# Altium PCB WEST_Radio_AX5043.PcbDoc (part 2 of 3)
Units mil, origin at the board's own origin, x right, y up, seen from the top; angles counter-clockwise.
Board outline 6000 x 4000 mil, 2 copper layers (Top Layer, Bottom Layer); 127 components, 96 nets, 412 pads, 18 vias.
Unrouted connection lines stored in the file: 276.
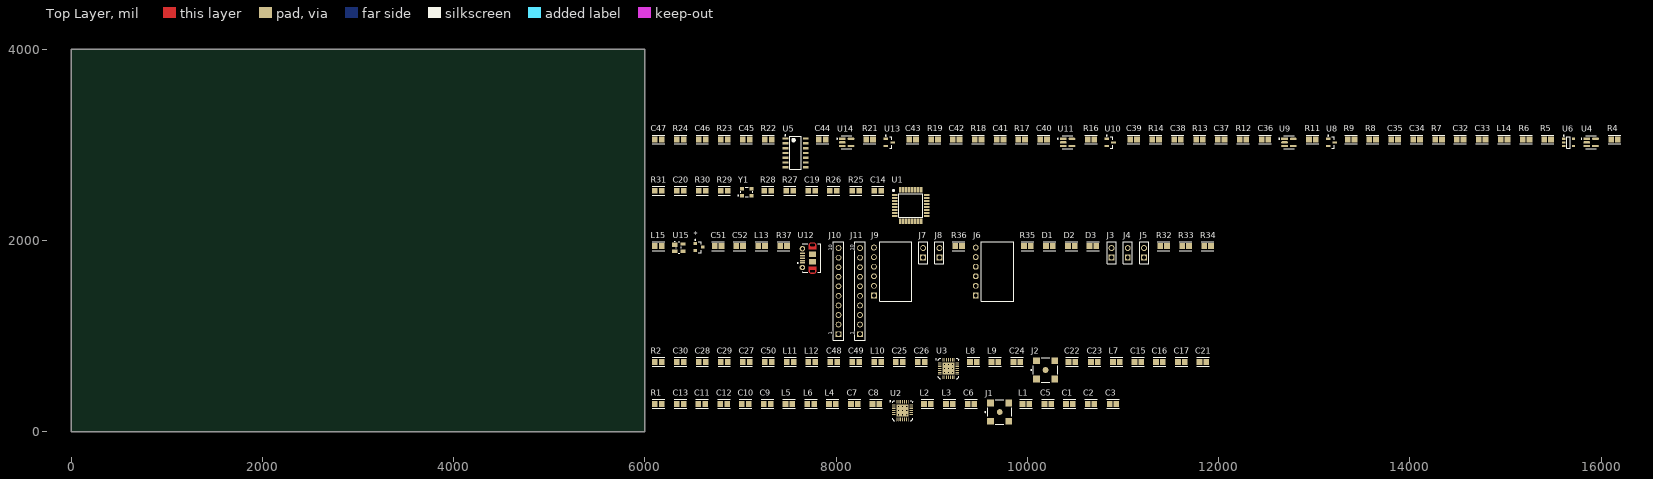
[diagram p0: Top Layer view]

## Part data (continued)
J1 J2: library part 73251-1350, "RF Connectors / Coaxial Connectors SMA ST PCB-JCK STD SMT", Manufacturer=Molex, Package Quantity=1600, Supplier Part Number 1=WM9357-ND, Body Material=Brass, Body Plating=Gold, Case/Package=SMA, Category="RF / Coaxial Connectors", ComponentLink1Description=https://datasheet.ciiva.com/22652/1443748-22652884.pdf?src-supplier=Element14, ComponentLink1URL=https://datasheet.ciiva.com/22652/1443748-22652884.pdf?src-supplier=Element14, ComponentLink2Description=https://datasheet.ciiva.com/5718/1716114-5718582.pdf?src-supplier=Farnell, ComponentLink2URL=https://datasheet.ciiva.com/5718/1716114-5718582.pdf?src-supplier=Farnell, ComponentLink3Description=https://datasheet.ciiva.com/7996/1818909-7996462.pdf?src-supplier=Element14, ComponentLink3URL=https://datasheet.ciiva.com/7996/1818909-7996462.pdf?src-supplier=Element14, ComponentLink4Description=https://datasheet.ciiva.com/23673/1763868-23673641.pdf?src-supplier=Newark, ComponentLink4URL=https://datasheet.ciiva.com/23673/1763868-23673641.pdf?src-supplier=Newark, ComponentLink5Description=https://datasheet.ciiva.com/15226/getdatasheetpartid-152891-15226055.pdf?src-supplier=Verical, ComponentLink5URL=https://datasheet.ciiva.com/15226/getdatasheetpartid-152891-15226055.pdf?src-supplier=Verical, Connector Type=SMA,Coaxial, Contact Material=Copper, Contact Plating=Gold, Depth=6.35mm, Gender=Female, Halogen Free="Low Halogen", Impedance=50R, Insulation Material=Teflon, Length=6.35mm, Manufacturer Part Number=73251-1350, Orientation=Straight, Packaging=Tray, Pricing 1="1=3.73000, 10=3.28200, 80=2.61025, 1600=2.08824 (USD)", Radiation Hardening=No, REACH SVHC=Unknown, RoHS=Yes, RoHS Compliant=Yes, Series=73251, Supplier 1=Digi-Key, Termination=Solder
J3 J4 J5 J7 J8: library part SSQ-102-01-G-S, "Headers & Wire Housings Tiger Buy Socket Strip with Square Tails, 0.100 Pitch", Color=Black, Contact Resistance=10mR, Current Rating=7.6A, Manufacturer=Samtec, Max Operating Temperature=125°C, Max Voltage Rating (AC)=550V, Min Operating Temperature=-55°C, Supplier Part Number 1=SAM1180-02-ND, Category="Headers and Wire Housings", ComponentLink1Description=https://datasheet.ciiva.com/25617/0900766b81159fd6-25617381.pdf?src-supplier=RSComponents, ComponentLink1URL=https://datasheet.ciiva.com/25617/0900766b81159fd6-25617381.pdf?src-supplier=RSComponents, ComponentLink2Description=https://datasheet.ciiva.com/22677/82032-22677596.pdf?src-supplier=Element14, ComponentLink2URL=https://datasheet.ciiva.com/22677/82032-22677596.pdf?src-supplier=Element14, ComponentLink3Description=https://datasheet.ciiva.com/748/ssq-1xx-xx-xxx-x-xx-xxx-xx-x-mkt-748393.pdf?src-supplier=Digi-Key, ComponentLink3URL=https://datasheet.ciiva.com/748/ssq-1xx-xx-xxx-x-xx-xxx-xx-x-mkt-748393.pdf?src-supplier=Digi-Key, Connector Type=Receptacle, Contact Material=Bronze, Contact Plating=Gold, Contact Type="Female Socket", Depth=2.41mm, Gender=Receptacle, Housing Color=Black, Housing Material=Polymer, Lead Free="Lead Free", Length=5.59mm, Manufacturer Part Number=SSQ-102-01-G-S, Max Current Rating=7.6A, Mount="Through Hole", Number of Contacts=2, Number of Positions=2, Number of Rows=1, Orientation=Vertical, Packaging=Bulk, Pitch=2.54mm, Pricing 1="1=0.50000, 10=0.46700, 25=0.42000, 50=0.37320, 100=0.35770, 250=0.32660, 500=0.31104 (USD)", Radiation Hardening=No, REACH SVHC="No SVHC", RoHS=Yes, RoHS Compliant=Yes, Series=SSQ, Stock 1=1869, Supplier 1=Digi-Key, Termination=Solder, Voltage Rating=550V
J6 J9: library part SSW-106-02-G-S-RA, "Conn Socket Strip SKT 6 POS 2.54mm Solder RA Side Entry Thru-Hole Tube", Color=Black, Contact Resistance=10mR, Current Rating=6.9A, Manufacturer=Samtec, Max Operating Temperature=125°C, Max Voltage Rating (AC)=550V, Min Operating Temperature=-55°C, Supplier Part Number 1=SAM1225-06-ND, Category="Headers and Wire Housings", ComponentLink1Description=https://datasheet.ciiva.com/25617/0900766b8115c03d-25617516.pdf?src-supplier=RSComponents, ComponentLink1URL=https://datasheet.ciiva.com/25617/0900766b8115c03d-25617516.pdf?src-supplier=RSComponents, ComponentLink2Description=https://datasheet.ciiva.com/22677/82032-22677496.pdf?src-supplier=Element14, ComponentLink2URL=https://datasheet.ciiva.com/22677/82032-22677496.pdf?src-supplier=Element14, ComponentLink3Description=https://datasheet.ciiva.com/750/ssw-1xx-xx-xxx-x-xx-xxx-xx-mkt-750270.pdf?src-supplier=Digi-Key, ComponentLink3URL=https://datasheet.ciiva.com/750/ssw-1xx-xx-xxx-x-xx-xxx-xx-mkt-750270.pdf?src-supplier=Digi-Key, Connector Type=Receptacle, Contact Material=Bronze, Contact Plating=Gold, Contact Type="Female Socket", Depth=10.03mm, Gender=Receptacle, Housing Color=Black, Housing Material=Polymer, Lead Free="Lead Free", Length=15.75mm, Manufacturer Part Number=SSW-106-02-G-S-RA, Mating Cycles=100, Max Current Rating=6.9A, Mount="Through Hole", Number of Contacts=6, Number of Positions=6, Number of Rows=1, Orientation="Right Angle", Packaging=Bulk, Pitch=2.54mm, Pricing 1="1=1.36000, 10=1.19700, 25=1.12680, 50=1.07980, 100=1.03280, 250=0.93888, 500=0.84500 (USD)", Radiation Hardening=No, REACH SVHC="No SVHC", RoHS=Yes, RoHS Compliant=Yes, Series=SSW, Stock 1=2072, Supplier 1=Digi-Key, Termination=Solder, Voltage Rating=550V
J10 J11: library part 61301011821, "THT Vertical Socket Header WR-PHD, Pitch 2.54 mm, Single Row, 10 pins", Color=Black, Current Rating=3A, Flammability Rating="UL94 V-0", Insulation Resistance=1GR, Manufacturer="Wurth Electronics", Max Operating Temperature=125°C, Min Operating Temperature=-40°C, Package Quantity=320, Supplier Part Number 1=732-2859-ND, Voltage Rating=250V, Category="Headers and Wire Housings", ComponentLink1Description=https://datasheet.ciiva.com/8043/1320173-8043339.pdf?src-supplier=Element14, ComponentLink1URL=https://datasheet.ciiva.com/8043/1320173-8043339.pdf?src-supplier=Element14, ComponentLink2Description=https://datasheet.ciiva.com/755/6130xx11821-755848.pdf?src-supplier=Digi-Key, ComponentLink2URL=https://datasheet.ciiva.com/755/6130xx11821-755848.pdf?src-supplier=Digi-Key, ComponentLink3Description=https://datasheet.ciiva.com/48686/001088188-da-01-en-wr-phd-buchsenleiste-61301011821-48686454.pdf?src-supplier=Conrad, ComponentLink3URL=https://datasheet.ciiva.com/48686/001088188-da-01-en-wr-phd-buchsenleiste-61301011821-48686454.pdf?src-supplier=Conrad, Connector Type=Header, Contact Gender=Female, Contact Material="Copper Alloy,Copper", Contact Plating=Gold, Contact Type="Female Socket", Gender=Receptacle, Height=8.5mm, Housing Material=PBT, Insulation=Insulated, Lead Free="Lead Free", Length=25.9mm, Manufacturer Part Number=61301011821, Mount="Through Hole", Number of Contacts=10, Number of Positions=10, Number of Rows=1, Packaging=Tray, Pitch=2.54mm, Pricing 1="1=0.68000, 10=0.66300, 50=0.61200, 100=0.56100, 320=0.51000 (USD)", REACH SVHC=Unknown, RoHS=Yes, RoHS Compliant=Yes, Series=WR-PHD, Stock 1=2490, Supplier 1=Digi-Key, Termination="Through Hole", Width=25.9mm
L1 L5: library part LQW2BASR10J00L, "Ind RF Chip Wirewound 100nH 5% 150MHz 65Q-Factor 400mA 0805 Embossed T/R", Case Code (Imperial)=0806, Case Code (Metric)=2015, Case/Package=0805, Current Rating=400mA, DC Resistance (DCR)=460mR, Manufacturer=Murata, Max Operating Temperature=125°C, Min Operating Temperature=-55°C, Package Quantity=2000, Resistor Type=Wirewound, Self Resonant Frequency=1.25GHz, Supplier Part Number 1=490-5664-1-ND, Test Frequency=150MHz, Tolerance=5%, Category="Fixed Inductors", ComponentLink1Description=https://datasheet.ciiva.com/4975/l0075s0080lqw2ba-125197-4975968.pdf?src-supplier=Mouser, ComponentLink1URL=https://datasheet.ciiva.com/4975/l0075s0080lqw2ba-125197-4975968.pdf?src-supplier=Mouser, ComponentLink2Description=https://datasheet.ciiva.com/1044/l0075s0080lqw2ba-1044724.pdf?src-supplier=Digi-Key, ComponentLink2URL=https://datasheet.ciiva.com/1044/l0075s0080lqw2ba-1044724.pdf?src-supplier=Digi-Key, ComponentLink3Description=https://datasheet.ciiva.com/1044/l0075s0080lqw2ba-1044725.pdf?src-supplier=Digi-Key, ComponentLink3URL=https://datasheet.ciiva.com/1044/l0075s0080lqw2ba-1044725.pdf?src-supplier=Digi-Key, ComponentLink4Description=https://datasheet.ciiva.com/1044/l0075s0080lqw2ba-1044726.pdf?src-supplier=Digi-Key, ComponentLink4URL=https://datasheet.ciiva.com/1044/l0075s0080lqw2ba-1044726.pdf?src-supplier=Digi-Key, ComponentLink5Description=https://datasheet.ciiva.com/3080/l0075s0080lqw2ba-3080333.pdf?src-supplier=Avnet, ComponentLink5URL=https://datasheet.ciiva.com/3080/l0075s0080lqw2ba-3080333.pdf?src-supplier=Avnet, Core Material=Air, Depth=1.73mm, Height=1.42mm, Height - Seated (Max)=0.06inch, Inductance=100nH, Length=0.082inch, Manufacturer Part Number=LQW2BASR10J00L, Max DC Current=400mA, Mount="Surface Mount", Packaging="Tape and Reel", Pricing 1="1=0.25000, 10=0.22800, 25=0.20240, 50=0.17200, 100=0.15180, 250=0.13916, 500=0.12650, 1000=0.10626 (USD)", Q Factor=65, Radiation Hardening=No, RoHS=Yes, RoHS Compliant=Yes, Series=LQW2BA, Shielding=Unshielded, Stock 1=1394, Supplier 1=Digi-Key, Termination=SMD/SMT, Weight=0.000494oz, Width=1.5mm
L2 L4: library part LQW2BAS43NJ00L, "Ind RF Chip Wirewound 43nH 5% 200MHz 60Q-Factor 500mA 0805 Embossed T/R", Case Code (Imperial)=0805, Case Code (Metric)=2015, Current Rating=500mA, DC Resistance (DCR)=340mR, Manufacturer=Murata, Max Operating Temperature=125°C, Min Operating Temperature=-55°C, Package Quantity=2000, Resistor Type=Wirewound, Self Resonant Frequency=1.8GHz, Supplier Part Number 1=490-5658-1-ND, Test Frequency=200MHz, Tolerance=5%, Case/Package=0805, Category="Fixed Inductors", ComponentLink1Description=https://datasheet.ciiva.com/1044/l0075s0080lqw2ba-1044718.pdf?src-supplier=Digi-Key, ComponentLink1URL=https://datasheet.ciiva.com/1044/l0075s0080lqw2ba-1044718.pdf?src-supplier=Digi-Key, ComponentLink2Description=https://datasheet.ciiva.com/1044/l0075s0080lqw2ba-1044719.pdf?src-supplier=Digi-Key, ComponentLink2URL=https://datasheet.ciiva.com/1044/l0075s0080lqw2ba-1044719.pdf?src-supplier=Digi-Key, ComponentLink3Description=https://datasheet.ciiva.com/1044/l0075s0080lqw2ba-1044720.pdf?src-supplier=Digi-Key, ComponentLink3URL=https://datasheet.ciiva.com/1044/l0075s0080lqw2ba-1044720.pdf?src-supplier=Digi-Key, ComponentLink4Description=https://datasheet.ciiva.com/3080/l0075s0080lqw2ba-3080323.pdf?src-supplier=Avnet, ComponentLink4URL=https://datasheet.ciiva.com/3080/l0075s0080lqw2ba-3080323.pdf?src-supplier=Avnet, Core Material=Air, DC Current=500mA, Depth=1.73mm, Height=1.42mm, Height - Seated (Max)=0.06inch, Inductance=43nH, Length=0.082inch, Manufacturer Part Number=LQW2BAS43NJ00L, Max DC Current=500mA, Military Standard=Not, Mount="Surface Mount", Packaging="Tape and Reel", Pricing 1="1=0.25000, 10=0.22800, 25=0.20240, 50=0.17200, 100=0.15180, 250=0.13916, 500=0.12650, 1000=0.10626 (USD)", Q Factor=60, Radiation Hardening=No, RoHS=Yes, RoHS Compliant=Yes, Series=LQW2BA, Shielding=Unshielded, Stock 1=3838, Supplier 1=Digi-Key, Termination=SMD/SMT, Weight=0.000494oz, Width=0.06inch
L3 L6: library part LQW2BAS27NJ00L, "Ind RF Chip Wirewound 27nH 0.5A ±5% 0805", Case Code (Imperial)=0806, Case Code (Metric)=2015, Case/Package=0805, Current Rating=500mA, DC Resistance (DCR)=250mR, Manufacturer=Murata, Max Operating Temperature=125°C, Min Operating Temperature=-55°C, Package Quantity=2000, Resistor Type=Wirewound, Self Resonant Frequency=2.58GHz, Supplier Part Number 1=490-5654-1-ND, Test Frequency=250MHz, Tolerance=5%, Category="Fixed Inductors", ComponentLink1Description=https://datasheet.ciiva.com/1044/l0075s0080lqw2ba-1044713.pdf?src-supplier=Digi-Key, ComponentLink1URL=https://datasheet.ciiva.com/1044/l0075s0080lqw2ba-1044713.pdf?src-supplier=Digi-Key, ComponentLink2Description=https://datasheet.ciiva.com/1044/l0075s0080lqw2ba-1044712.pdf?src-supplier=Digi-Key, ComponentLink2URL=https://datasheet.ciiva.com/1044/l0075s0080lqw2ba-1044712.pdf?src-supplier=Digi-Key, ComponentLink3Description=https://datasheet.ciiva.com/1044/l0075s0080lqw2ba-1044714.pdf?src-supplier=Digi-Key, ComponentLink3URL=https://datasheet.ciiva.com/1044/l0075s0080lqw2ba-1044714.pdf?src-supplier=Digi-Key, ComponentLink4Description=https://datasheet.ciiva.com/3080/l0075s0080lqw2ba-3080317.pdf?src-supplier=Avnet, ComponentLink4URL=https://datasheet.ciiva.com/3080/l0075s0080lqw2ba-3080317.pdf?src-supplier=Avnet, Core Material=Air,Non-Magnetic, DC Current=500mA, Depth=1.73mm, Height=1.42mm, Height - Seated (Max)=0.06inch, Inductance=27nH, Length=0.082inch, Manufacturer Part Number=LQW2BAS27NJ00L, Max DC Current=500mA, Military Standard=Not, Mount="Surface Mount", Packaging="Tape and Reel", Pricing 1="1=0.25000, 10=0.22800, 25=0.20240, 50=0.17200, 100=0.15180, 250=0.13916, 500=0.12650, 1000=0.10626 (USD)", Q Factor=55, Radiation Hardening=No, RoHS=Yes, RoHS Compliant=Yes, Series=LQW, Shielding=Unshielded, Stock 1=2095, Supplier 1=Digi-Key, Termination=SMD/SMT, Weight=0.000494oz, Width=1.5mm
L7 L11: library part LQW2BASR15J00L, "Ind RF Chip Wirewound 150nH 5% 100MHz 50Q-Factor 400mA 0805 Embossed T/R", Case Code (Imperial)=0806, Case Code (Metric)=2015, Case/Package=0805, Current Rating=400mA, DC Resistance (DCR)=560mR, Manufacturer=Murata, Max Operating Temperature=125°C, Min Operating Temperature=-55°C, Package Quantity=2000, Resistor Type=Wirewound, Self Resonant Frequency=920MHz, Supplier Part Number 1=490-5667-1-ND, Test Frequency=100MHz, Tolerance=5%, Category="Fixed Inductors", ComponentLink1Description=https://datasheet.ciiva.com/1056/l0075s0080lqw2ba-1056256.pdf?src-supplier=Digi-Key, ComponentLink1URL=https://datasheet.ciiva.com/1056/l0075s0080lqw2ba-1056256.pdf?src-supplier=Digi-Key, ComponentLink2Description=https://datasheet.ciiva.com/1056/l0075s0080lqw2ba-1056257.pdf?src-supplier=Digi-Key, ComponentLink2URL=https://datasheet.ciiva.com/1056/l0075s0080lqw2ba-1056257.pdf?src-supplier=Digi-Key, ComponentLink3Description=https://datasheet.ciiva.com/1056/l0075s0080lqw2ba-1056258.pdf?src-supplier=Digi-Key, ComponentLink3URL=https://datasheet.ciiva.com/1056/l0075s0080lqw2ba-1056258.pdf?src-supplier=Digi-Key, ComponentLink4Description=https://datasheet.ciiva.com/3080/l0075s0080lqw2ba-3080336.pdf?src-supplier=Avnet, ComponentLink4URL=https://datasheet.ciiva.com/3080/l0075s0080lqw2ba-3080336.pdf?src-supplier=Avnet, Core Material=Air, DC Current=400mA, Depth=1.73mm, Height=1.42mm, Height - Seated (Max)=0.06inch, Inductance=150nH, Length=0.082inch, Manufacturer Part Number=LQW2BASR15J00L, Max DC Current=400mA, Military Standard=Not, Mount="Surface Mount", Packaging="Tape and Reel", Pricing 1="1=0.25000, 10=0.22800, 25=0.20240, 50=0.17200, 100=0.15180, 250=0.13916, 500=0.12650, 1000=0.10626 (USD)", Q Factor=50, Radiation Hardening=No, RoHS=Yes, RoHS Compliant=Yes, Series=LQW2BA, Shielding=Unshielded, Stock 1=10064, Supplier 1=Digi-Key, Termination=SMD/SMT, Weight=0.000494oz, Width=0.06inch
L8 L10: library part LQW2BHNR12J03L, "Inductor RF Chip Wirewound 120nH 5% 100MHz 40Q-Factor Air 320mA 400mOhm DCR 0805 Embossed T/R", Case Code (Imperial)=0805, Case Code (Metric)=2012, Current Rating=320mA, DC Resistance (DCR)=400mR, Manufacturer=Murata, Max Operating Temperature=85°C, Min Operating Temperature=-55°C, Package Quantity=2000, Resistor Type=Wirewound, Self Resonant Frequency=750MHz, Supplier Part Number 1=490-11792-1-ND, Test Frequency=100MHz, Tolerance=5%, Case/Package=0805, Category="Fixed Inductors", ComponentLink1Description=https://datasheet.ciiva.com/11801/0900766b80f155f9-11801532.pdf?src-supplier=RSComponents, ComponentLink1URL=https://datasheet.ciiva.com/11801/0900766b80f155f9-11801532.pdf?src-supplier=RSComponents, ComponentLink2Description=https://datasheet.ciiva.com/29691/o05e-29691995.pdf?src-supplier=Digi-Key, ComponentLink2URL=https://datasheet.ciiva.com/29691/o05e-29691995.pdf?src-supplier=Digi-Key, ComponentLink3Description=https://datasheet.ciiva.com/8508/l0075s0081lqw2bh-03-8508453.pdf?src-supplier=Avnet, ComponentLink3URL=https://datasheet.ciiva.com/8508/l0075s0081lqw2bh-03-8508453.pdf?src-supplier=Avnet, Core Material=Non-Magnetic,Air, DC Current=320mA, Depth=1.7mm, Height=1.7mm, Height - Seated (Max)=0.07inch, Inductance=120nH, Length=0.079inch, Manufacturer Part Number=LQW2BHNR12J03L, Max DC Current=320mA, Military Standard=Not, Mount="Surface Mount", Packaging="Tape and Reel", Pricing 1="1=0.48000, 10=0.42900, 25=0.37520, 50=0.32180, 100=0.29490, 250=0.26812, 500=0.25204, 1000=0.19305 (USD)", Q Factor=40, Radiation Hardening=No, RoHS=Yes, RoHS Compliant=Yes, Series=LQW2BHN_03, Shielding=Unshielded, Stock 1=2009, Supplier 1=Digi-Key, Termination=SMD/SMT, Weight=0.000317oz, Width=1.5mm
L9 L12: library part LQW2BAS68NJ00L, "Ind RF Chip Wirewound 68nH 5% 200MHz 60Q-Factor 500mA 0805 Embossed T/R", Case Code (Imperial)=0805, Case Code (Metric)=2015, Current Rating=500mA, DC Resistance (DCR)=380mR, Manufacturer=Murata, Max Operating Temperature=125°C, Min Operating Temperature=-55°C, Package Quantity=2000, Resistor Type=Wirewound, Self Resonant Frequency=1.5GHz, Supplier Part Number 1=490-5661-1-ND, Test Frequency=200MHz, Tolerance=5%, Case/Package=0805, Category="Fixed Inductors", ComponentLink1Description=https://datasheet.ciiva.com/1044/l0075s0080lqw2ba-1044766.pdf?src-supplier=Digi-Key, ComponentLink1URL=https://datasheet.ciiva.com/1044/l0075s0080lqw2ba-1044766.pdf?src-supplier=Digi-Key, ComponentLink2Description=https://datasheet.ciiva.com/1044/l0075s0080lqw2ba-1044767.pdf?src-supplier=Digi-Key, ComponentLink2URL=https://datasheet.ciiva.com/1044/l0075s0080lqw2ba-1044767.pdf?src-supplier=Digi-Key, ComponentLink3Description=https://datasheet.ciiva.com/1044/l0075s0080lqw2ba-1044768.pdf?src-supplier=Digi-Key, ComponentLink3URL=https://datasheet.ciiva.com/1044/l0075s0080lqw2ba-1044768.pdf?src-supplier=Digi-Key, ComponentLink4Description=https://datasheet.ciiva.com/3080/l0075s0080lqw2ba-3080327.pdf?src-supplier=Avnet, ComponentLink4URL=https://datasheet.ciiva.com/3080/l0075s0080lqw2ba-3080327.pdf?src-supplier=Avnet, ComponentLink5Description=https://datasheet.ciiva.com/16448/l0075s0080lqw2ba-16448937.pdf?src-supplier=Future+Electronics, ComponentLink5URL=https://datasheet.ciiva.com/16448/l0075s0080lqw2ba-16448937.pdf?src-supplier=Future+Electronics, Core Material=Air,Non-Magnetic, DC Current=500mA, Depth=1.73mm, Height=1.42mm, Height - Seated (Max)=0.06inch, Inductance=68nH, Lead Free="Lead Free", Length=0.082inch, Manufacturer Part Number=LQW2BAS68NJ00L, Max DC Current=500mA, Military Standard=Not, Mount="Surface Mount", Packaging="Tape and Reel", Pricing 1="1=0.25000, 10=0.22800, 25=0.20240, 50=0.17200, 100=0.15180, 250=0.13916, 500=0.12650, 1000=0.10626 (USD)", Q Factor=60, Radiation Hardening=No, RoHS=Yes, RoHS Compliant=Yes, Series=LQW, Shielding=Unshielded, Stock 1=1897, Supplier 1=Digi-Key, Termination=SMD/SMT, Weight=0.000494oz, Width=0.06inch
L13 L15: "0805 120Ω ±25% DCR=0.09Ω 1A ferrite bead", Case Code (Imperial)=0805, Case Code (Metric)=2012, Current Rating=800mA, DC Current=200mA, DC Resistance (DCR)=100mR, Frequency=100MHz, Manufacturer=Murata, Max Current Rating=1A, Max Operating Temperature=125°C, Min Operating Temperature=-55°C, Package Quantity=1, Resistance=150mR, Supplier Part Number 1=81-BLM21AG121SN1D, Tolerance=25%, Case/Package=0805, Category=Inductors, ComponentLink1Description=https://datasheet.ciiva.com/5709/5155-5709216.pdf?src-supplier=Farnell, ComponentLink1URL=https://datasheet.ciiva.com/5709/5155-5709216.pdf?src-supplier=Farnell, ComponentLink2Description=https://datasheet.ciiva.com/41449/001172324-da-01-en-drossel-0805-120r-2-0x1-25mm-4000st-41449639.pdf?src-supplier=Conrad, ComponentLink2URL=https://datasheet.ciiva.com/41449/001172324-da-01-en-drossel-0805-120r-2-0x1-25mm-4000st-41449639.pdf?src-supplier=Conrad, ComponentLink3Description=https://datasheet.ciiva.com/29347/442447-da-01-en-chip-drossel-0805-120r-200ma-2-0x1-25mm-29347998.pdf?src-supplier=Conrad, ComponentLink3URL=https://datasheet.ciiva.com/29347/442447-da-01-en-chip-drossel-0805-120r-200ma-2-0x1-25mm-29347998.pdf?src-supplier=Conrad, ComponentLink4Description=https://datasheet.ciiva.com/1012/l0110s0100blm21a-1012654.pdf?src-supplier=Digi-Key, ComponentLink4URL=https://datasheet.ciiva.com/1012/l0110s0100blm21a-1012654.pdf?src-supplier=Digi-Key, ComponentLink5Description=https://datasheet.ciiva.com/1012/l0110s0100blm21a-1012653.pdf?src-supplier=Digi-Key, ComponentLink5URL=https://datasheet.ciiva.com/1012/l0110s0100blm21a-1012653.pdf?src-supplier=Digi-Key, ComponentLink6Description=https://datasheet.ciiva.com/1012/l0110s0100blm21a-1012655.pdf?src-supplier=Digi-Key, ComponentLink6URL=https://datasheet.ciiva.com/1012/l0110s0100blm21a-1012655.pdf?src-supplier=Digi-Key, ComponentLink7Description=https://datasheet.ciiva.com/3081/l0110s0100blm21a-3081641.pdf?src-supplier=Avnet, ComponentLink7URL=https://datasheet.ciiva.com/3081/l0110s0100blm21a-3081641.pdf?src-supplier=Avnet, ComponentLink8Description=https://datasheet.ciiva.com/16355/l0110s0100blm21a-16355286.pdf?src-supplier=Future+Electronics, ComponentLink8URL=https://datasheet.ciiva.com/16355/l0110s0100blm21a-16355286.pdf?src-supplier=Future+Electronics, ComponentLink9Description=https://datasheet.ciiva.com/3082/l0110s0100blm21a-3082729.pdf?src-supplier=Avnet, ComponentLink9URL=https://datasheet.ciiva.com/3082/l0110s0100blm21a-3082729.pdf?src-supplier=Avnet, Core Material=Ferrite, DC Resistance-Max=100mR, Depth=1.25mm, Height=0.85mm, Impedance=120R, Lead Free="Lead Free", Length=2mm, Manufacturer Part Number=BLM21AG121SN1D, Material=Steel,Ferrite, Max DC Current=200mA, Military Standard=Not, Number of Circuits=1, Number of Lines=1, Number of Pins=2, Packaging="Tape and Reel", Pricing 1="1=0.15000, 10=0.07700, 50=0.07700, 100=0.05300, 500=0.04800, 1000=0.04200, 4000=0.04000, 10000=0.04000 (USD)", Radiation Hardening=No, REACH SVHC="No SVHC", RoHS=Yes, RoHS Compliant=Yes, Series=BLM21A, Shielding=Unshielded, Supplier 1=Mouser, Termination=SMD/SMT, Test Frequency=100MHz, Width=1.25mm
L14: library part LQM21PN2R2MC0D, "0805 2.2uH ±20% DCR=340mΩ 600mA SRF=50MHz", Case Code (Imperial)=0805, Case Code (Metric)=2012, Current Rating=600mA, DC Resistance (DCR)=340mR, Inductance Tolerance=20%, Manufacturer=Murata, Max Operating Temperature=125°C, Min Operating Temperature=-55°C, Package Quantity=4000, Self Resonant Frequency=50MHz, Supplier Part Number 1=490-4994-1-ND, Test Frequency=1MHz, Case/Package=0805, Category="Fixed Inductors", ComponentLink1Description=https://datasheet.ciiva.com/30490/0900766b81256150-30490215.pdf?src-supplier=RSComponents, ComponentLink1URL=https://datasheet.ciiva.com/30490/0900766b81256150-30490215.pdf?src-supplier=RSComponents, ComponentLink2Description=https://datasheet.ciiva.com/16456/l0075s0104lqm21p-c0-16456044.pdf?src-supplier=Future+Electronics, ComponentLink2URL=https://datasheet.ciiva.com/16456/l0075s0104lqm21p-c0-16456044.pdf?src-supplier=Future+Electronics, Core Material=Ferrite, DC Current=600mA, Depth=1.45mm, Height=0.5mm, Height - Seated (Max)=0.022inch, Inductance=2.2uH, Lead Free="Lead Free", Length=2mm, Manufacturer Part Number=LQM21PN2R2MC0D, Max DC Current=600mA, Military Standard=Not, Mount="Surface Mount", Packaging="Tape and Reel", Pricing 1="1=0.24000, 10=0.21400, 25=0.18760, 50=0.16060, 100=0.14730, 250=0.13388, 500=0.12584, 1000=0.09639 (USD)", Radiation Hardening=No, Rated Current-Max=600mA, REACH SVHC="No SVHC", RoHS=Yes, RoHS Compliant=Yes, Series=LQM21PN_CO, Shielding=Shielded, Stock 1=52990, Supplier 1=Digi-Key, Termination=SMD/SMT, Tolerance=20%, Width=0.049inch
R1 R2 R27 R28 R29 R30 R31: library part CRCW08050000Z0EA, "CRCW Series 0805 0.125 W 0 Ohm Jumper Surface Mount Thick Film Chip Resistor", Case Code (Imperial)=0805, Case Code (Metric)=2012, Manufacturer=Vishay, Max Operating Temperature=155°C, Max Power Dissipation=125mW, Min Operating Temperature=-55°C, Package Quantity=1, Resistance=0mR, Resistance Tolerance=1%, Resistor Type="Thick Film", Supplier Part Number 1=541-0.0ADKR-ND, Temperature Coefficient=100ppm/°C, Voltage Rating=150V, Case/Package=0805, Category="Chip SMD Resistors", ComponentLink1Description=https://datasheet.ciiva.com/11811/0900766b80d98b26-11811304.pdf?src-supplier=RSComponents, ComponentLink1URL=https://datasheet.ciiva.com/11811/0900766b80d98b26-11811304.pdf?src-supplier=RSComponents, ComponentLink2Description=https://datasheet.ciiva.com/2463/dcrcwe3-2463037.pdf?src-supplier=Digi-Key, ComponentLink2URL=https://datasheet.ciiva.com/2463/dcrcwe3-2463037.pdf?src-supplier=Digi-Key, ComponentLink3Description=https://datasheet.ciiva.com/2463/dcrcwe3-2463038.pdf?src-supplier=Digi-Key, ComponentLink3URL=https://datasheet.ciiva.com/2463/dcrcwe3-2463038.pdf?src-supplier=Digi-Key, ComponentLink4Description=https://datasheet.ciiva.com/2463/dcrcwe3-2463039.pdf?src-supplier=Digi-Key, ComponentLink4URL=https://datasheet.ciiva.com/2463/dcrcwe3-2463039.pdf?src-supplier=Digi-Key, ComponentLink5Description=https://datasheet.ciiva.com/5543/dcrcwe3-109170-5543096.pdf?src-supplier=Mouser, ComponentLink5URL=https://datasheet.ciiva.com/5543/dcrcwe3-109170-5543096.pdf?src-supplier=Mouser, ComponentLink6Description=https://datasheet.ciiva.com/16389/dcrcwe3-16389338.pdf?src-supplier=Future+Electronics, ComponentLink6URL=https://datasheet.ciiva.com/16389/dcrcwe3-16389338.pdf?src-supplier=Future+Electronics, ComponentLink7Description=https://datasheet.ciiva.com/7841/1697337-7841629.pdf?src-supplier=Element14, ComponentLink7URL=https://datasheet.ciiva.com/7841/1697337-7841629.pdf?src-supplier=Element14, ComponentLink8Description=https://datasheet.ciiva.com/7841/1720486-7841839.pdf?src-supplier=Element14, ComponentLink8URL=https://datasheet.ciiva.com/7841/1720486-7841839.pdf?src-supplier=Element14, ComponentLink9Description=https://datasheet.ciiva.com/26314/fld-crcw-e3-data-en-26314630.pdf?src-supplier=Distrelec, ComponentLink9URL=https://datasheet.ciiva.com/26314/fld-crcw-e3-data-en-26314630.pdf?src-supplier=Distrelec, ComponentLink10Description=https://datasheet.ciiva.com/16719/70201119-16719706.pdf?src-supplier=Allied+Electronics, ComponentLink10URL=https://datasheet.ciiva.com/16719/70201119-16719706.pdf?src-supplier=Allied+Electronics, Construction=Rectangular, Contact Plating=Tin,Lead, Depth=1.25mm, Features="Automotive AEC-Q200", Height=0.45mm, Lead Free="Lead Free", Length=2mm, Manufacturer Part Number=CRCW08050000Z0EA, Military Standard=Not, Number of Terminations=2, Packaging="Tape and Reel", Power Rating=125mW, Pricing 1="1=0.10000, 10=0.04400, 25=0.03160, 50=0.02400, 100=0.01770, 250=0.01352, 500=0.01080, 1000=0.00795 (USD)", Radiation Hardening=No, REACH SVHC=Unknown, RoHS=Yes, RoHS Compliant=Yes, Series=CRCW, Size Code=0805, Supplier 1=Digi-Key, Technology="THICK FILM", Termination=SMD/SMT, Tolerance=1%, Voltage Rating (DC)=150V, Weight=0.000194oz, Width=1.25mm
R4 R5 R6 R7 R11 R12 R13 R16 R17 R18 R21 R22 R23: library part ERJ6ENF5103V, "贴片电阻 510KΩ ±1% 1/8W ±100ppm/℃ 0805", Case Code (Imperial)=0805, Case Code (Metric)=2012, Manufacturer=Panasonic, Max Operating Temperature=155°C, Max Power Dissipation=125mW, Min Operating Temperature=-55°C, Package Quantity=1, Resistance=510kR, Resistance Tolerance=1%, Resistor Type="Thick Film", Supplier Part Number 1=P510KCCT-ND, Temperature Coefficient=100ppm/°C, Voltage Rating=150V, Case/Package=0805, Category="Chip SMD Resistors", ComponentLink1Description=https://datasheet.ciiva.com/11821/0900766b80f80784-11821669.pdf?src-supplier=RSComponents, ComponentLink1URL=https://datasheet.ciiva.com/11821/0900766b80f80784-11821669.pdf?src-supplier=RSComponents, ComponentLink2Description=https://datasheet.ciiva.com/46375/1678782-46375866.pdf?src-supplier=Element14, ComponentLink2URL=https://datasheet.ciiva.com/46375/1678782-46375866.pdf?src-supplier=Element14, ComponentLink3Description=https://datasheet.ciiva.com/22762/1678782-22762871.pdf?src-supplier=Farnell, ComponentLink3URL=https://datasheet.ciiva.com/22762/1678782-22762871.pdf?src-supplier=Farnell, ComponentLink4Description=https://datasheet.ciiva.com/46375/1678782-46375865.pdf?src-supplier=Element14, ComponentLink4URL=https://datasheet.ciiva.com/46375/1678782-46375865.pdf?src-supplier=Element14, ComponentLink5Description=https://datasheet.ciiva.com/24027/aoa0000ce2-24027049.pdf?src-supplier=Mouser, ComponentLink5URL=https://datasheet.ciiva.com/24027/aoa0000ce2-24027049.pdf?src-supplier=Mouser, ComponentLink6Description=https://datasheet.ciiva.com/9181/aoa0000ce2-9181533.pdf?src-supplier=Avnet, ComponentLink6URL=https://datasheet.ciiva.com/9181/aoa0000ce2-9181533.pdf?src-supplier=Avnet, ComponentLink7Description=https://datasheet.ciiva.com/30195/aoa0000ce2-30195599.pdf?src-supplier=Onlinecomponents.com, ComponentLink7URL=https://datasheet.ciiva.com/30195/aoa0000ce2-30195599.pdf?src-supplier=Onlinecomponents.com, Construction=Rectangular, Contact Plating=Tin, Depth=1.25mm, Features="Automotive AEC-Q200", Height=0.6mm, Lead Free="Lead Free", Length=2mm, Manufacturer Part Number=ERJ6ENF5103V, Military Standard=Not, Mount="Surface Mount", Number of Terminations=2, Packaging="Tape and Reel", Power Rating=125mW, Pricing 1="1=0.10000, 10=0.08900, 100=0.03440, 1000=0.01512, 2500=0.01306 (USD)", Radiation Hardening=No, REACH SVHC="No SVHC", RoHS=Yes, RoHS Compliant=Yes, Series=ERJ, Size Code=0805, Stock 1=22956, Supplier 1=Digi-Key, Technology="THICK FILM", Termination=SMD/SMT, Tolerance=1%, Voltage Rating (DC)=150V, Width=0.049inch
R8: library part ERA-6AEB134V, "Res Thin Film 0805 130K Ohm 0.1% 1/8W ±25ppm/°C Molded SMD SMD Punched Carrier T/R", Case Code (Imperial)=0805, Case Code (Metric)=2012, Manufacturer=Panasonic, Max Operating Temperature=155°C, Max Power Dissipation=125mW, Min Operating Temperature=-55°C, Package Quantity=1, Resistance=130kR, Resistance Tolerance=0.1%, Resistor Type="Thin Film", Supplier Part Number 1=P130KDACT-ND, Temperature Coefficient=25ppm/°C, Voltage Rating=100V, Case/Package=0805, Category="Chip SMD Resistors", ComponentLink1Description=https://datasheet.ciiva.com/26335/453691-da-01-en-widerstand-0805-era-26335728.pdf?src-supplier=Conrad, ComponentLink1URL=https://datasheet.ciiva.com/26335/453691-da-01-en-widerstand-0805-era-26335728.pdf?src-supplier=Conrad, ComponentLink2Description=https://datasheet.ciiva.com/5915/485442-5915198.pdf?src-supplier=Farnell, ComponentLink2URL=https://datasheet.ciiva.com/5915/485442-5915198.pdf?src-supplier=Farnell, ComponentLink3Description=https://datasheet.ciiva.com/46376/485442-46376974.pdf?src-supplier=Element14, ComponentLink3URL=https://datasheet.ciiva.com/46376/485442-46376974.pdf?src-supplier=Element14, ComponentLink4Description=https://datasheet.ciiva.com/7795/485442-7795115.pdf?src-supplier=Element14, ComponentLink4URL=https://datasheet.ciiva.com/7795/485442-7795115.pdf?src-supplier=Element14, ComponentLink5Description=https://datasheet.ciiva.com/22739/485442-22739481.pdf?src-supplier=Element14, ComponentLink5URL=https://datasheet.ciiva.com/22739/485442-22739481.pdf?src-supplier=Element14, ComponentLink6Description=https://datasheet.ciiva.com/24023/aoa0000ce26-197354-24023974.pdf?src-supplier=Mouser, ComponentLink6URL=https://datasheet.ciiva.com/24023/aoa0000ce26-197354-24023974.pdf?src-supplier=Mouser, ComponentLink7Description=https://datasheet.ciiva.com/9185/aoa0000ce26-9185919.pdf?src-supplier=Avnet, ComponentLink7URL=https://datasheet.ciiva.com/9185/aoa0000ce26-9185919.pdf?src-supplier=Avnet, ComponentLink8Description=https://datasheet.ciiva.com/30125/54aoa0000ce26-30125359.pdf?src-supplier=Onlinecomponents.com, ComponentLink8URL=https://datasheet.ciiva.com/30125/54aoa0000ce26-30125359.pdf?src-supplier=Onlinecomponents.com, Construction=Rectangular, Contact Plating=Tin, Depth=1.25mm, Features="Automotive AEC-Q200", Height=0.5mm, Lead Free="Lead Free", Length=2mm, Manufacturer Part Number=ERA-6AEB134V, Military Standard=Not, Mount="Surface Mount", Number of Pins=2, Number of Terminations=2, Packaging="Tape and Reel", Power Rating=125mW, Pricing 1="1=0.36000, 10=0.30100, 100=0.11770, 1000=0.04927, 2500=0.04516 (USD)", Radiation Hardening=No, REACH SVHC="No SVHC", RoHS=Yes, RoHS Compliant=Yes, Series=ERA-6A, Stock 1=57925, Supplier 1=Digi-Key, Technology="THIN FILM", Termination=Solder, Tolerance=0.1%, Voltage Rating (DC)=100V, Width=1.25mm
R9 R37: library part RC0805FR-07100KL, "贴片电阻 100000Ω ± 1.00% 0.125W ± 100ppm/℃ 0805", Case Code (Imperial)=0805, Case Code (Metric)=2012, Manufacturer=Yageo, Max Operating Temperature=155°C, Max Power Dissipation=125mW, Min Operating Temperature=-55°C, Package Quantity=1, Resistance=100kR, Resistance Tolerance=1%, Resistor Type="Thick Film", Supplier Part Number 1=311-100KCRCT-ND, Temperature Coefficient=100ppm/°C, Voltage Rating=150V, Case/Package=0805, Category="Chip SMD Resistors", ComponentLink1Description=https://datasheet.ciiva.com/7941/1686128-7941677.pdf?src-supplier=Element14, ComponentLink1URL=https://datasheet.ciiva.com/7941/1686128-7941677.pdf?src-supplier=Element14, ComponentLink2Description=https://datasheet.ciiva.com/7660/38627-7660796.pdf?src-supplier=Element14, ComponentLink2URL=https://datasheet.ciiva.com/7660/38627-7660796.pdf?src-supplier=Element14, Construction=Rectangular, Depth=1.25mm, Features="Moisture Resistant", Height=0.024inch, Lead Free="Lead Free", Lead Pitch=0.4mm, Length=2mm, Manufacturer Part Number=RC0805FR-07100KL, Military Standard=Not, Number of Pins=2, Number of Terminations=2, Packaging="Tape and Reel", Power Rating=125mW, Pricing 1="1=0.10000, 10=0.04200, 100=0.01690, 1000=0.00759, 2500=0.00659 (USD)", REACH SVHC=Unknown, RoHS=Yes, RoHS Compliant=Yes, Series=RC, Size Code=0805, Stock 1=2547195, Supplier 1=Digi-Key, Technology="THICK FILM", Termination=SMD/SMT, Tolerance=1%, Voltage Rating (DC)=150V, Width=0.049inch
R14 R19 R24: library part CRCW0805330KJNEA, "Res Thick Film 0805 330K Ohm 5% 1/8W ±200ppm/°C Molded SMD SMD Paper T/R", Case Code (Imperial)=0805, Case Code (Metric)=2012, Manufacturer="Vishay Dale", Max Operating Temperature=155°C, Max Power Dissipation=125mW, Min Operating Temperature=-55°C, Package Quantity=1, Resistance=330kR, Resistance Tolerance=5%, Resistor Type="Thick Film", Supplier Part Number 1=541-330KACT-ND, Temperature Coefficient=200ppm/°C, Voltage Rating=150V, Case/Package=0805, Category="Chip SMD Resistors", ComponentLink1Description=https://datasheet.ciiva.com/2493/dcrcwe3-2493836.pdf?src-supplier=Digi-Key, ComponentLink1URL=https://datasheet.ciiva.com/2493/dcrcwe3-2493836.pdf?src-supplier=Digi-Key, ComponentLink2Description=https://datasheet.ciiva.com/2493/dcrcwe3-2493837.pdf?src-supplier=Digi-Key, ComponentLink2URL=https://datasheet.ciiva.com/2493/dcrcwe3-2493837.pdf?src-supplier=Digi-Key, ComponentLink3Description=https://datasheet.ciiva.com/5561/dcrcwe3-109170-5561991.pdf?src-supplier=Mouser, ComponentLink3URL=https://datasheet.ciiva.com/5561/dcrcwe3-109170-5561991.pdf?src-supplier=Mouser, ComponentLink4Description=https://datasheet.ciiva.com/2493/dcrcwe3-2493835.pdf?src-supplier=Digi-Key, ComponentLink4URL=https://datasheet.ciiva.com/2493/dcrcwe3-2493835.pdf?src-supplier=Digi-Key, ComponentLink5Description=https://datasheet.ciiva.com/46391/1807946-46391932.pdf?src-supplier=Element14, ComponentLink5URL=https://datasheet.ciiva.com/46391/1807946-46391932.pdf?src-supplier=Element14, ComponentLink6Description=https://datasheet.ciiva.com/16213/dcrcwe3-16213979.pdf?src-supplier=Future+Electronics, ComponentLink6URL=https://datasheet.ciiva.com/16213/dcrcwe3-16213979.pdf?src-supplier=Future+Electronics, ComponentLink7Description=https://datasheet.ciiva.com/16778/70201119-16778586.pdf?src-supplier=Allied+Electronics, ComponentLink7URL=https://datasheet.ciiva.com/16778/70201119-16778586.pdf?src-supplier=Allied+Electronics, Construction=Rectangular, Contact Plating=Tin, Depth=1.25mm, Features="Automotive AEC-Q200", Height=0.02inch, Lead Free="Lead Free", Length=2mm, Manufacturer Part Number=CRCW0805330KJNEA, Military Standard=Not, Number of Terminations=2, Packaging="Tape and Reel", Power Rating=125mW, Pricing 1="1=0.10000, 10=0.05000, 100=0.02040, 1000=0.00914, 2500=0.00794 (USD)", Radiation Hardening=No, REACH SVHC=Unknown, RoHS=Yes, RoHS Compliant=Yes, Series=CRCW, Size Code=0805, Stock 1=1, Supplier 1=Digi-Key, Technology="THICK FILM", Termination=SMD/SMT, Tolerance=5%, Voltage Rating (DC)=150V, Weight=0.000194oz, Width=1.25mm
R25: library part ERJ-6ENF1000V, "贴片电阻 100Ω ±1% 1/8W ±100ppm/℃ 0805", Case Code (Imperial)=0805, Case Code (Metric)=2012, Manufacturer=Panasonic, Max Operating Temperature=155°C, Max Power Dissipation=125mW, Min Operating Temperature=-55°C, Package Quantity=1, Resistance Tolerance=1%, Resistor Type="Thick Film", Supplier Part Number 1=P100CCT-ND, Temperature Coefficient=100ppm/°C, Voltage Rating=150V, Case/Package=0805, Category="Chip SMD Resistors", ComponentLink1Description=https://datasheet.ciiva.com/11808/0900766b80f80784-11808206.pdf?src-supplier=RSComponents, ComponentLink1URL=https://datasheet.ciiva.com/11808/0900766b80f80784-11808206.pdf?src-supplier=RSComponents, ComponentLink2Description=https://datasheet.ciiva.com/7830/426256-7830744.pdf?src-supplier=Element14, ComponentLink2URL=https://datasheet.ciiva.com/7830/426256-7830744.pdf?src-supplier=Element14, ComponentLink3Description=https://datasheet.ciiva.com/7830/1678782-7830986.pdf?src-supplier=Element14, ComponentLink3URL=https://datasheet.ciiva.com/7830/1678782-7830986.pdf?src-supplier=Element14, ComponentLink4Description=https://datasheet.ciiva.com/46419/1678782-46419878.pdf?src-supplier=Element14, ComponentLink4URL=https://datasheet.ciiva.com/46419/1678782-46419878.pdf?src-supplier=Element14, ComponentLink5Description=https://datasheet.ciiva.com/16765/70260748-16765594.pdf?src-supplier=Allied+Electronics, ComponentLink5URL=https://datasheet.ciiva.com/16765/70260748-16765594.pdf?src-supplier=Allied+Electronics, ComponentLink6Description=https://datasheet.ciiva.com/9186/aoa0000ce2-9186686.pdf?src-supplier=Avnet, ComponentLink6URL=https://datasheet.ciiva.com/9186/aoa0000ce2-9186686.pdf?src-supplier=Avnet, ComponentLink7Description=https://datasheet.ciiva.com/30154/aoa0000ce2-30154938.pdf?src-supplier=Onlinecomponents.com, ComponentLink7URL=https://datasheet.ciiva.com/30154/aoa0000ce2-30154938.pdf?src-supplier=Onlinecomponents.com, Construction=Rectangular, Contact Plating=Tin, Depth=1.25mm, Features="Automotive AEC-Q200", Height=0.6mm, Lead Free="Lead Free", Length=2mm, Manufacturer Part Number=ERJ-6ENF1000V, Military Standard=Not, Mount="Surface Mount", Number of Pins=2, Number of Terminations=2, Packaging="Tape and Reel", Power Rating=125mW, Radiation Hardening=No, REACH SVHC="No SVHC", Resistance=100R, RoHS=Yes, RoHS Compliant=Yes, Series=ERJ, Size Code=0805, Supplier 1=Digi-Key, Technology="THICK FILM", Termination=SMD/SMT, Tolerance=1%, Voltage Rating (DC)=150V, Width=1.2mm
R26: library part ERA-6AEB103V, "高精度、低温漂贴片电阻 10KΩ ±0.1% 1/8W ±25ppm/℃ 0805", Case Code (Imperial)=0805, Case Code (Metric)=2012, Manufacturer=Panasonic, Max Operating Temperature=155°C, Max Power Dissipation=125mW, Min Operating Temperature=-55°C, Package Quantity=5000, Resistance=10kR, Resistance Tolerance=0.1%, Resistor Type="Thin Film", Supplier Part Number 1=P10KDACT-ND, Temperature Coefficient=25ppm/°C, Voltage Rating=100V, Case/Package=0805, Category="Chip SMD Resistors", ComponentLink1Description=https://datasheet.ciiva.com/11810/0900766b80beefcc-11810466.pdf?src-supplier=RSComponents, ComponentLink1URL=https://datasheet.ciiva.com/11810/0900766b80beefcc-11810466.pdf?src-supplier=RSComponents, ComponentLink2Description=https://datasheet.ciiva.com/26335/453339-da-01-en-widerstand-0805-era-26335701.pdf?src-supplier=Conrad, ComponentLink2URL=https://datasheet.ciiva.com/26335/453339-da-01-en-widerstand-0805-era-26335701.pdf?src-supplier=Conrad, ComponentLink3Description=https://datasheet.ciiva.com/43455/485442-43455269.pdf?src-supplier=Farnell, ComponentLink3URL=https://datasheet.ciiva.com/43455/485442-43455269.pdf?src-supplier=Farnell, ComponentLink4Description=https://datasheet.ciiva.com/7830/485442-7830639.pdf?src-supplier=Element14, ComponentLink4URL=https://datasheet.ciiva.com/7830/485442-7830639.pdf?src-supplier=Element14, ComponentLink5Description=https://datasheet.ciiva.com/7830/485442-7830638.pdf?src-supplier=Element14, ComponentLink5URL=https://datasheet.ciiva.com/7830/485442-7830638.pdf?src-supplier=Element14, ComponentLink6Description=https://datasheet.ciiva.com/48529/era-eng-tds-48529783.pdf?src-supplier=Distrelec, ComponentLink6URL=https://datasheet.ciiva.com/48529/era-eng-tds-48529783.pdf?src-supplier=Distrelec, ComponentLink7Description=https://datasheet.ciiva.com/7830/485442-7830637.pdf?src-supplier=Element14, ComponentLink7URL=https://datasheet.ciiva.com/7830/485442-7830637.pdf?src-supplier=Element14, ComponentLink8Description=https://datasheet.ciiva.com/22785/485442-22785935.pdf?src-supplier=Farnell, ComponentLink8URL=https://datasheet.ciiva.com/22785/485442-22785935.pdf?src-supplier=Farnell, ComponentLink9Description=https://datasheet.ciiva.com/28513/485442-28513862.pdf?src-supplier=Element14, ComponentLink9URL=https://datasheet.ciiva.com/28513/485442-28513862.pdf?src-supplier=Element14, ComponentLink10Description=https://datasheet.ciiva.com/24072/aoa0000ce26-197354-24072839.pdf?src-supplier=Mouser, ComponentLink10URL=https://datasheet.ciiva.com/24072/aoa0000ce26-197354-24072839.pdf?src-supplier=Mouser, ComponentLink11Description=https://datasheet.ciiva.com/16776/70068849-16776328.pdf?src-supplier=Allied+Electronics, ComponentLink11URL=https://datasheet.ciiva.com/16776/70068849-16776328.pdf?src-supplier=Allied+Electronics, ComponentLink12Description=https://datasheet.ciiva.com/16762/70068849-16762828.pdf?src-supplier=Allied+Electronics, ComponentLink12URL=https://datasheet.ciiva.com/16762/70068849-16762828.pdf?src-supplier=Allied+Electronics, ComponentLink13Description=https://datasheet.ciiva.com/16200/aoa0000ce26-16200216.pdf?src-supplier=Future+Electronics, ComponentLink13URL=https://datasheet.ciiva.com/16200/aoa0000ce26-16200216.pdf?src-supplier=Future+Electronics, ComponentLink14Description=https://datasheet.ciiva.com/48531/aoa0000ce26-48531095.pdf?src-supplier=Avnet, ComponentLink14URL=https://datasheet.ciiva.com/48531/aoa0000ce26-48531095.pdf?src-supplier=Avnet, Construction=Rectangular, Contact Plating=Tin, Depth=1.25mm, Height=0.5mm, Lead Free="Lead Free", Length=2mm, Manufacturer Part Number=ERA-6AEB103V, Military Standard=Not, Mount="Surface Mount", Number of Pins=2, Number of Terminations=2, Packaging="Tape and Reel", Power Rating=125mW, Radiation Hardening=No, REACH SVHC="No SVHC", RoHS=Yes, RoHS Compliant=Yes, Series=ERA-6A, Supplier 1=Digi-Key, Technology="THIN FILM", Termination=SMD/SMT, Tolerance=0.1%, Voltage Rating (DC)=100V, Width=1.25mm, Working Voltage=100V
R32 R33 R34 R35 R36: library part CRCW08051K00FKEA, "Res Thick Film 0805 1K Ohm 1% 1/8W ±100ppm/°C Molded SMD Paper T/R", Case Code (Imperial)=0805, Case Code (Metric)=2012, Manufacturer="Vishay Dale", Max Operating Temperature=155°C, Max Power Dissipation=125mW, Min Operating Temperature=-55°C, Package Quantity=5000, Resistance=1kR, Resistance Tolerance=1%, Resistor Type="Thick Film", Supplier Part Number 1=541-1.00KCDKR-ND, Temperature Coefficient=100ppm/°C, Voltage Rating=150V, Case/Package=0805, Category="Chip SMD Resistors", ComponentLink1Description=https://datasheet.ciiva.com/11808/0900766b80d98b26-11808530.pdf?src-supplier=RSComponents, ComponentLink1URL=https://datasheet.ciiva.com/11808/0900766b80d98b26-11808530.pdf?src-supplier=RSComponents, ComponentLink2Description=https://datasheet.ciiva.com/3258/dcrcwe3-3258215.pdf?src-supplier=Avnet, ComponentLink2URL=https://datasheet.ciiva.com/3258/dcrcwe3-3258215.pdf?src-supplier=Avnet, ComponentLink3Description=https://datasheet.ciiva.com/26312/fld-crcw-e3-data-en-26312922.pdf?src-supplier=Distrelec, ComponentLink3URL=https://datasheet.ciiva.com/26312/fld-crcw-e3-data-en-26312922.pdf?src-supplier=Distrelec, ComponentLink4Description=https://datasheet.ciiva.com/16213/dcrcwe3-16213643.pdf?src-supplier=Future+Electronics, ComponentLink4URL=https://datasheet.ciiva.com/16213/dcrcwe3-16213643.pdf?src-supplier=Future+Electronics, ComponentLink5Description=https://datasheet.ciiva.com/46381/1697337-46381606.pdf?src-supplier=Element14, ComponentLink5URL=https://datasheet.ciiva.com/46381/1697337-46381606.pdf?src-supplier=Element14, ComponentLink6Description=https://datasheet.ciiva.com/46441/1720486-46441626.pdf?src-supplier=Element14, ComponentLink6URL=https://datasheet.ciiva.com/46441/1720486-46441626.pdf?src-supplier=Element14, Construction=Rectangular, Contact Plating=Tin, Depth=1.25mm, Features="Automotive AEC-Q200", Height=0.45mm, Lead Free="Lead Free", Length=2mm, Manufacturer Part Number=CRCW08051K00FKEA, Military Standard=Not, Number of Pins=2, Number of Terminations=2, Packaging="Tape and Reel", Power Rating=125mW, Pricing 1="1=0.10000, 10=0.06700, 100=0.02710, 1000=0.01219, 2500=0.01058 (USD)", Radiation Hardening=No, REACH SVHC=Unknown, RoHS=Yes, RoHS Compliant=Yes, Series=CRCW, Size Code=0805, Stock 1=6505, Supplier 1=Digi-Key, Technology="THICK FILM", Termination=SMD/SMT, Tolerance=1%, Voltage Rating (DC)=150V, Weight=0.000194oz, Width=1.25mm
U1: Manufacturer=STMicroelectronics, Supplier Part Number 1=497-STM32G0B1KET6-ND, Manufacturer Part Number=STM32G0B1KET6, RoHS=Yes, Stock 1=712, Supplier 1=Digi-Key
U2 U3: library part AX5043-1-TW30, "Rf Transceiver ASK/AFSK/FM/FSK/4-FSK/GFSK/GMSK/MSK/PSK 1.8 V to 3.6V 28-PIN QFN T/r", Case/Package=QFN, Current - Receiving=11mA, Current - Transmitting=48mA, Frequency=27MHz, Manufacturer="ON Semiconductor", Max Operating Temperature=85°C, Min Operating Temperature=-40°C, Operating Supply Voltage=3.6V, Supplier Part Number 1=AX5043-1-TW30OSCT-ND, Category="RF Receivers, Transceivers", ComponentLink1Description=http://www.mouser.com/ds/2/308/AX5043-D-782042.pdf?src-supplier=Mouser, ComponentLink1URL=http://www.mouser.com/ds/2/308/AX5043-D-782042.pdf?src-supplier=Mouser, ComponentLink2Description=http://www.farnell.com/datasheets/2354976.pdf?src-supplier=Farnell, ComponentLink2URL=http://www.farnell.com/datasheets/2354976.pdf?src-supplier=Farnell, ComponentLink3Description=http://www.onsemi.com/pub_link/Collateral/AX5043-D.PDF?src-supplier=Digi-Key, ComponentLink3URL=http://www.onsemi.com/pub_link/Collateral/AX5043-D.PDF?src-supplier=Digi-Key, ComponentLink4Description=http://www.farnell.com/datasheets/2354976.pdf?src-supplier=Newark, ComponentLink4URL=http://www.farnell.com/datasheets/2354976.pdf?src-supplier=Newark, Contact Plating=Gold, Data Rate=125Kbps, Interface=SPI,UART, Lead Free="Lead Free", Manufacturer Part Number=AX5043-1-TW30, Mount="Surface Mount", Number of Pins=28, Packaging="Tape and Reel", Pricing 1="1=3.22000, 10=2.87800, 25=2.59040, 100=2.36020, 250=2.12992, 500=2.01478 (USD)", RoHS=Yes, Sensitivity=-137dBm, Stock 1=4719, Supplier 1=Digi-Key
U4 U9 U11 U14: library part INA168QPWRQ1, "AEC-Q100, 2.7 to 60V, 800kHz Variable gain current sense amplifier 8-TSSOP -40 to 125", Case/Package=TSSOP, Input Bias Current=10nA, Input Offset Voltage (Vos)=2mV, Manufacturer="Texas Instruments", Max Operating Temperature=125°C, Max Supply Voltage=60V, Min Operating Temperature=-40°C, Min Supply Voltage=2.7V, Nominal Supply Current=45uA, Package Quantity=1, Supplier Part Number 1=296-17201-1-ND, Accuracy=0.5%, Category="Amplifiers - Op Amps, Buffer, Instrumentation", Common Mode Rejection Ratio=100dB, ComponentLink1Description=https://datasheet.ciiva.com/15128/getdatasheetpartid-194017-15128474.pdf?src-supplier=Verical, ComponentLink1URL=https://datasheet.ciiva.com/15128/getdatasheetpartid-194017-15128474.pdf?src-supplier=Verical, ComponentLink2Description=https://datasheet.ciiva.com/2975/ina168-q1-2975797.pdf?src-supplier=Avnet, ComponentLink2URL=https://datasheet.ciiva.com/2975/ina168-q1-2975797.pdf?src-supplier=Avnet, ComponentLink3Description=https://datasheet.ciiva.com/1939/ina138-q1-1939748.pdf?src-supplier=Digi-Key, ComponentLink3URL=https://datasheet.ciiva.com/1939/ina138-q1-1939748.pdf?src-supplier=Digi-Key, ComponentLink4Description=https://datasheet.ciiva.com/1939/ina138-q1-1939747.pdf?src-supplier=Digi-Key, ComponentLink4URL=https://datasheet.ciiva.com/1939/ina138-q1-1939747.pdf?src-supplier=Digi-Key, ComponentLink5Description=https://datasheet.ciiva.com/1939/ina138-q1-1939749.pdf?src-supplier=Digi-Key, ComponentLink5URL=https://datasheet.ciiva.com/1939/ina138-q1-1939749.pdf?src-supplier=Digi-Key, ComponentLink6Description=https://datasheet.ciiva.com/2976/ina168-q1-2976124.pdf?src-supplier=Avnet, ComponentLink6URL=https://datasheet.ciiva.com/2976/ina168-q1-2976124.pdf?src-supplier=Avnet, Lead Free="Lead Free", Manufacturer Part Number=INA168QPWRQ1, Mount="Surface Mount", Number of Channels=1, Number of Elements=1, Number of Pins=8, Packaging="Tape and Reel", Pricing 1="1=3.24000, 10=2.91100, 25=2.75240, 100=2.38530, 250=2.26300, 500=2.03058, 1000=2.01950 (USD)", Radiation Hardening=No, RoHS=Yes, RoHS Compliant=Yes, Series=-, Stock 1=168, Supplier 1=Digi-Key, Supply Current=45uA, Weight=0.001217oz